# Altium PCB Arduino_3D_Extension..PcbDoc
Units mm, origin at the board's own origin, x right, y up, seen from the top; angles counter-clockwise.
Board outline 64.77 x 92.71 mm, 2 copper layers (Top Layer, Bottom Layer); 26 components, 38 nets, 84 pads, 2 vias.
Unrouted connection lines stored in the file: 1.
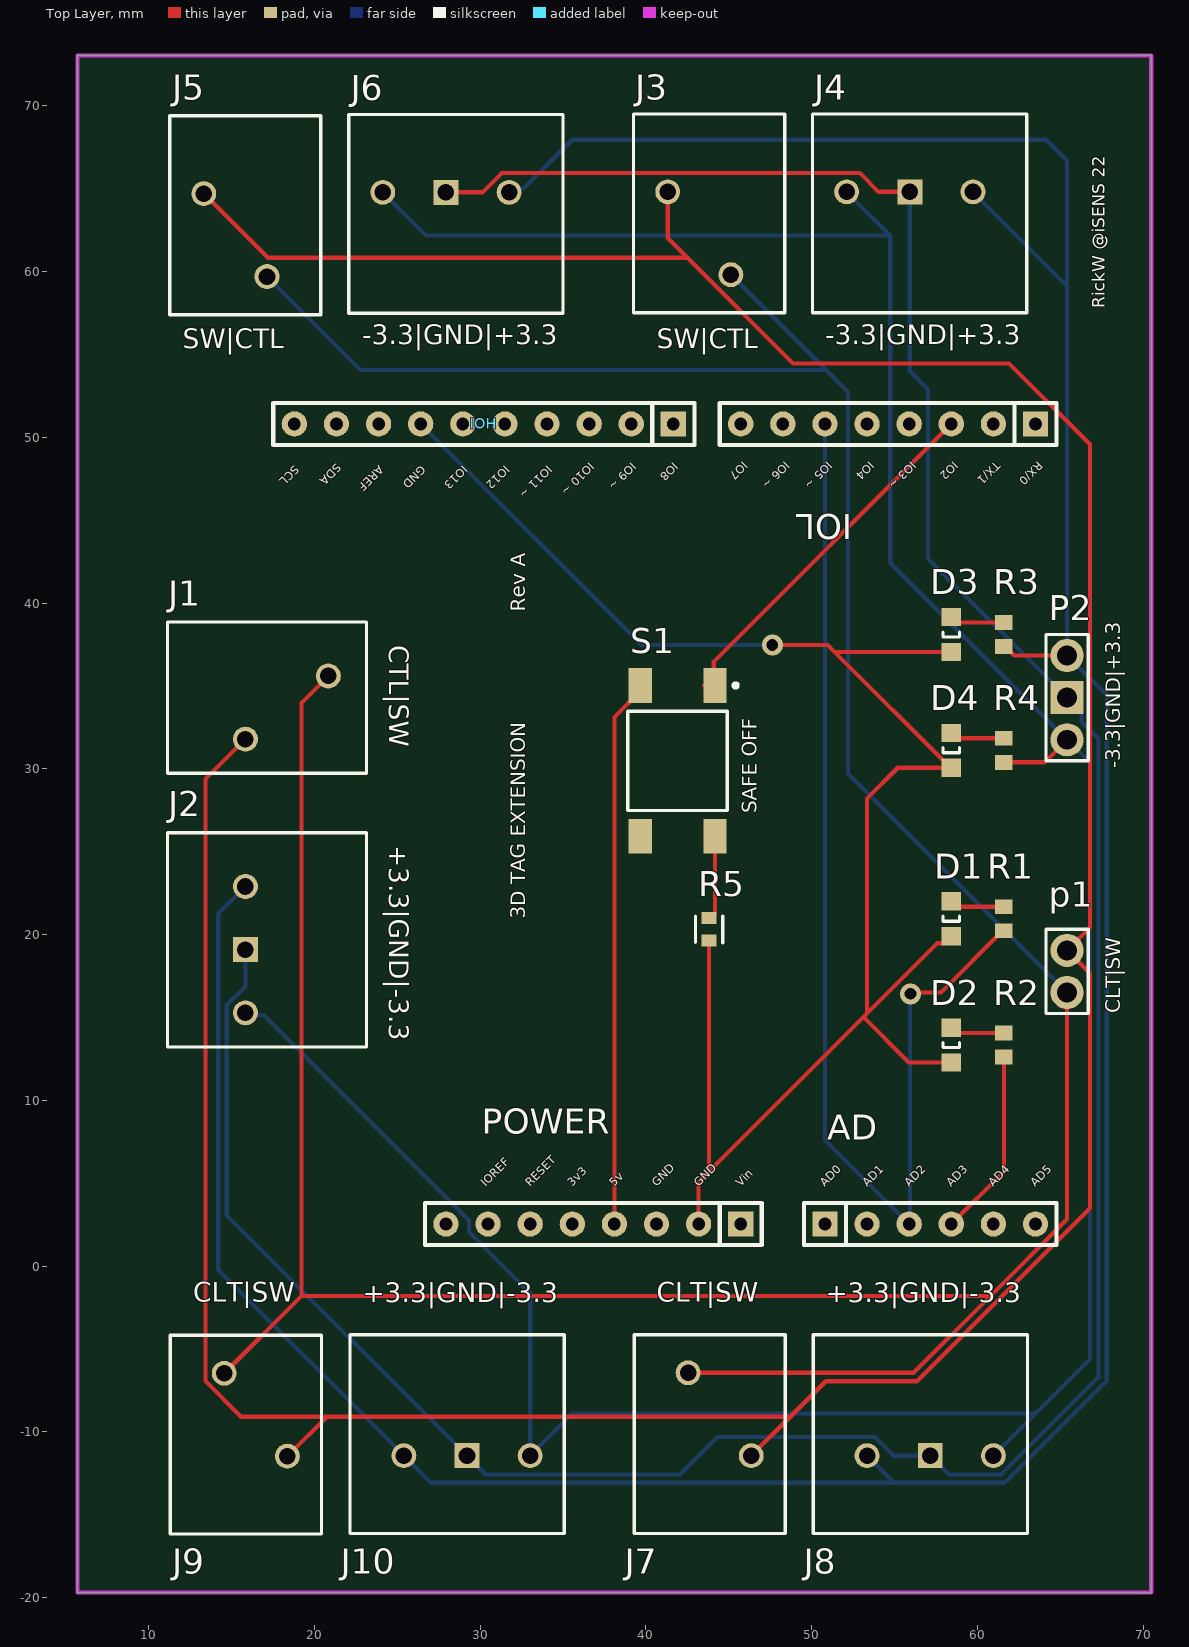
[diagram p0: Top Layer view]
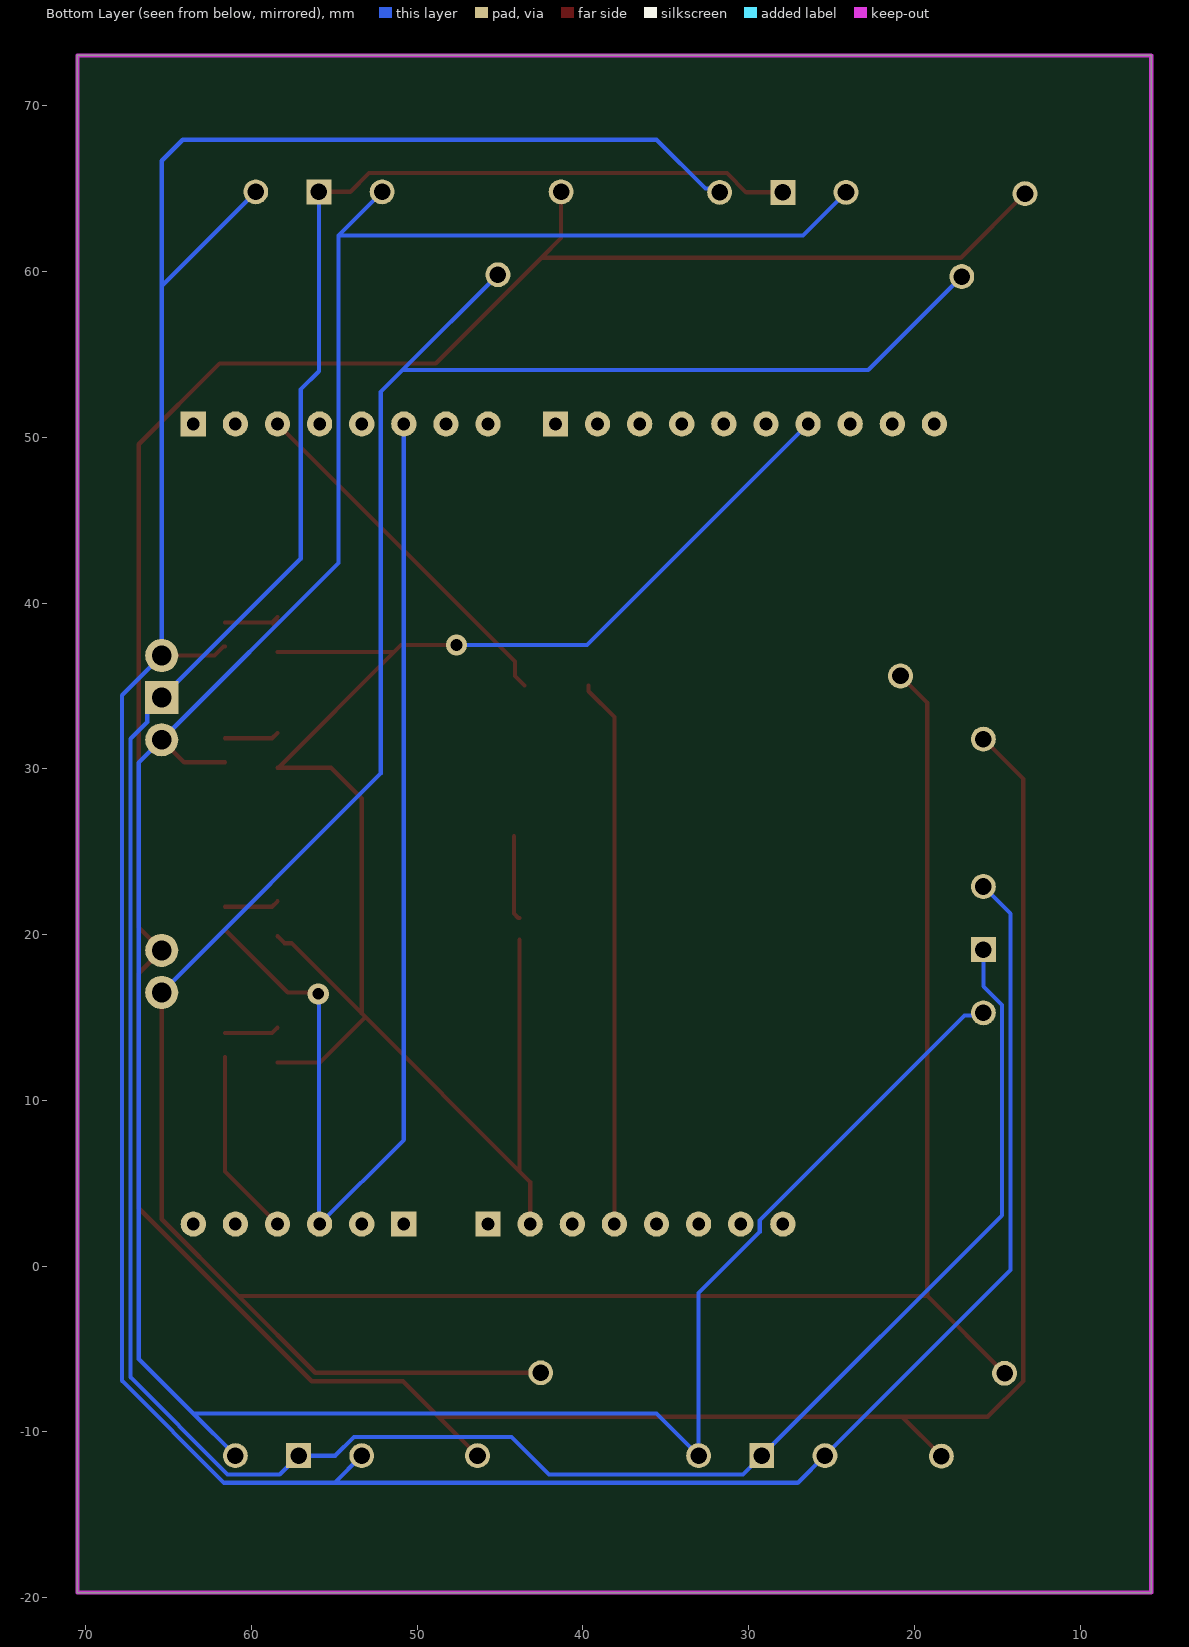
[diagram p1: Bottom Layer view, seen from below]
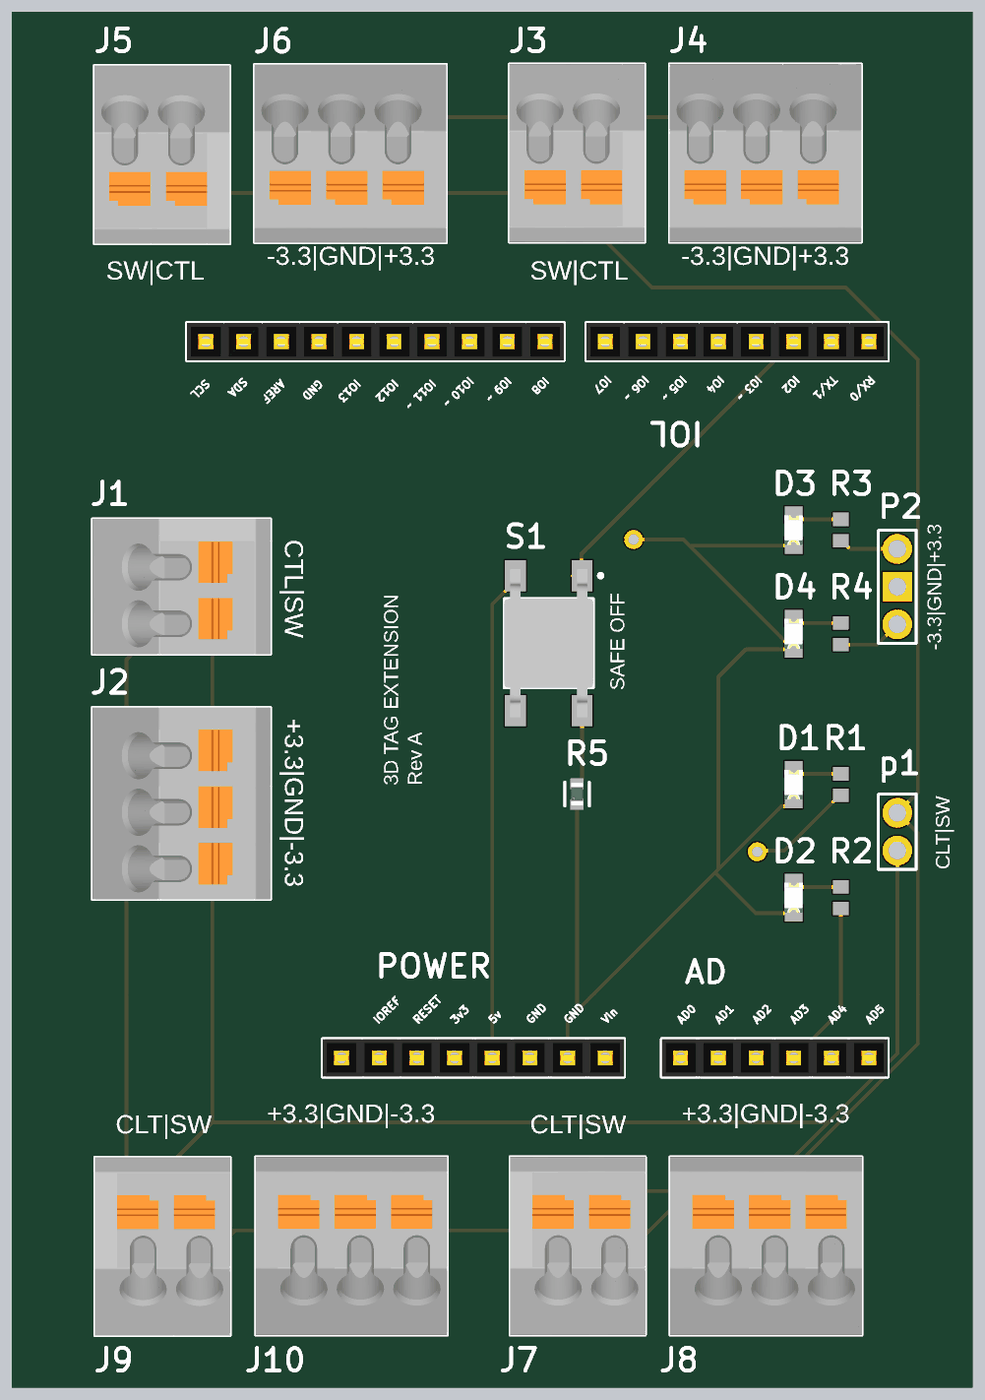
[diagram p2: 3D render of the assembled board from above, using the file's embedded part models]

## Layer stack, top to bottom
Top Solder: solder mask 0.0102, Solder Resist, Dk 3.5
Top Layer: signal copper 0.0356
Dielectric1: dielectric 0.32, FR-4, Dk 4.8
Bottom Layer: signal copper 0.0356
Bottom Solder: solder mask 0.0102, Solder Resist, Dk 3.5

## Board outline
5.715,-19.685 5.715,73.025 70.485,73.025 70.485,-19.685

## Design rules (kind name [scope] priority, off if disabled: settings)
Clearance [All] p1: gap=0.254 ignorepadtopadclearanceinfootprint=FALSE except(0: Arc-Hole Track-Hole SMDPad-Hole THPad-Hole Via-Hole Fill-Hole Poly-Hole Region-Hole Text-Hole)
PolygonConnect [All] p1: connectstyle=Relief reliefconductorwidth=0.254 reliefentries=4 polygonreliefangle="90 Angle" airgapwidth=0.254
RoutingVias [All] p1: holewidth=0.711 width=1.27 viastyle="Through Hole" minholewidth=0.711 minwidth=1.27 maxholewidth=0.711 maxwidth=1.27
SilkToSolderMaskClearance SilkscreenOverComponentPads [IsPad] p1: minsilkscreentomaskgap=0.254 clearancetoexposedcopper=TRUE
SolderMaskExpansion [All] p1: expansion=0.102 istentingtop=FALSE
Width [All] p1: maxlimit=0.254 minlimit=0.254 preferedwidth=0.254
29 further rules are at their usual default settings.

## Components (designator, comment, footprint, x,y, rotation, side; value= is the part's Value field where it differs from the comment)
AD "AD" "Header 6x1 8.5mm" 50.8,2.54 r0 top locked
D1 "Red" 0805_A 58.42,20.955 r90 top
D2 "Blue" 0805_A 58.42,13.335 r90 top
D3 "Yello" 0805_A 58.42,38.1 r90 top
D4 "Green" 0805_A 58.42,31.115 r90 top
IOH "IOH" "Header 10x1 8.5mm" 41.656,50.8 r180 top locked
IOL "IOL" "Header 8x1 8.5mm" 63.5,50.8 r180 top locked
J1 "691412320002" 691412320002 17.145,34.29 r270 top
J2 "691418320003" 691418320003 17.145,19.685 r270 top
J3 "691412320002" 691412320002 43.815,63.5 r180 top
J4 "691418320003" 691418320003 56.515,63.5 r180 top
J5 "691412320002" 691412320002 15.835,63.39 r180 top
J6 "691418320003" 691418320003 28.535,63.47 r180 top
J7 "691412320002" 691412320002 43.855,-10.13 r0 top
J8 "691418320003" 691418320003 56.555,-10.13 r0 top
J9 "691412320002" 691412320002 15.875,-10.16 r0 top
J10 "691418320003" 691418320003 28.615,-10.13 r0 top
p1 "CTL/SW" HDR1X2 65.405,16.51 r90 top (schematic designator P1)
P2 "Power" HDR1X3 65.405,31.75 r90 top
POWER "POWER_UNO" "Header 8x1 8.5mm" 45.72,2.54 r180 top locked
R1 "140" RESC1608X55X30ML15T15 61.595,20.955 r90 top
R2 "300" RESC1608X55X30ML15T15 61.595,13.335 r270 top
R3 "140" RESC1608X55X30ML15T15 61.595,38.1 r90 top
R4 "140" RESC1608X55X30ML15T15 61.595,31.115 r90 top
R5 "10K" FP-RNCP0603-MFG 43.815,20.32 r90 top
S1 "Safe Off" TECO-FSM4JSMA_V 41.91,30.48 r0 top

## Footprints (in the part's own frame and the unit in brackets; to place one, negate y for a bottom-side part, rotate by r counter-clockwise, add the part's x,y. Pads: shape width x height; smd on the part's side, far side on the other; paste and mask are expansions set on the pad)
0805_A [mm] "Chip LED, 2-Leads, Body 2.0x1.3mm, IPC Medium Density"
  rect 1.1x1.2 smd: 1(-1.05,0) 2(1.05,0)
  silkscreen extent -0.15,-0.5 0.15,0.5, body extent -1,-0.62 1,0.63, height 0.68
691412320002 [mm] "3.81mm 45¡ã Cable Entry Screwless, 2p"
  round 1.5 hole 1: 1(2.5,-1.3) 2(-1.31,3.7)
  silkscreen extent -4.56,-6 4.56,6, body extent -4.56,-6 4.56,6, height 13.28
691418320003 [mm] "Serie 4183-3.81mm 45¡ã Cable Entry Screwless, 3 pins"
  round 1.5 hole 1: 1(-3.215,-1.3) 3(4.405,-1.3)
  rect 1.5x1.5 hole 1: 2(0.595,-1.3)
  silkscreen extent -6.46,-6 6.47,6, body extent -6.47,-6 6.46,6, height 13.28
FP-RNCP0603-MFG [mm]
  rect 0.725x0.9 smd paste+0 mask+0: 1(-0.687,0) 2(0.687,0)
  silkscreen extent -0.81,-0.83 0.8,0.82, body extent -1.15,-0.55 1.15,0.55, height 0.25
HDR1X2 [mm] "Connector; Header; 2 Position"
  round 2 hole 1.2: 1(0,0) 2(2.54,0)
  silkscreen extent -1.27,-1.27 3.81,1.27
HDR1X3 [mm] "Connector; Header; 3 Position"
  round 2 hole 1.2: 1(0,0) 3(5.08,0)
  rect 2x2 hole 1.2: 2(2.54,0)
  silkscreen extent -1.27,-1.27 6.35,1.27
"Header 6x1 8.5mm" [mil] "Stackable 6 pin header"
  rect 60x60 hole 30: 1(0,0)
  round 60 hole 30: 2(100,0) 3(200,0) 4(300,0) 5(400,0) 6(500,0)
  silkscreen extent -50,-50 550,50, body extent -50,-50 550,50, height 335
"Header 8x1 8.5mm" [mil] "Stackable 8 pin header"
  rect 60x60 hole 30: 1(0,0)
  round 60 hole 30: 2(100,0) 3(200,0) 4(300,0) 5(400,0) 6(500,0) 7(600,0) 8(700,0)
  silkscreen extent -50,-50 750,50, body extent -50,-50 750,50, height 335
"Header 10x1 8.5mm" [mil] "Stackable 10 pin header"
  rect 60x60 hole 30: 1(0,0)
  round 60 hole 30: 2(100,0) 3(200,0) 4(300,0) 5(400,0) 6(500,0) 7(600,0) 8(700,0) 9(800,0) 10(900,0)
  silkscreen extent -50,-50 950,50, body extent -50,-50 950,50, height 335
RESC1608X55X30ML15T15 [mm] "Chip Resistor, 2-Leads, Body 1.60x0.80mm, IPC Low Density"
  rect 0.9x1.05 smd: 1(-0.725,0) 2(0.725,0)
  body extent -0.87,-0.48 0.87,0.48, height 0.55
TECO-FSM4JSMA_V [mm] "SMD, 4-Leads, Body 6x6mm, Pitch 4.5mm"
  rect 1.4x2.1 smd: 1(2.25,4.55) 2(2.25,-4.55) 3(-2.25,4.55) 4(-2.25,-4.55)
  silkscreen extent -3,-3 3.63,4.67, body extent -3,-5 3,5, height 5.08

## Part data
AD: Supplier Part Number 1=2699089, Supplier 1=Arrow, Supplier 2=Digi-Key, Supplier 3=Arrow, Supplier 4=Arrow, Supplier Part Number 2=SAM1198-06-ND, Supplier Part Number 3=2699088, Supplier Part Number 4=2699075
D1: library part CMP-1426-00011-1, "SMD mono-color Chip LED, WL-SMCW, Red", Manufacturer="Wuerth Elektronik", PartNumber=150080RS75000, Color=Red, ComponentLink1Description="Manufacturer URL", ComponentLink1URL=http://www.we-online.com, ComponentLink2Description=Datasheet, ComponentLink2URL=http://katalog.we-online.com/led/datasheet/150080RS75000.pdf, PackageReference=0805_A
D2: library part CMP-1426-00008-1, "SMD mono-color Chip LED, WL-SMCW, Blue", Manufacturer="Wuerth Elektronik", PartNumber=150080BS75000, Color=Blue, ComponentLink1Description="Manufacturer URL", ComponentLink1URL=http://www.we-online.com, ComponentLink2Description=Datasheet, ComponentLink2URL=http://katalog.we-online.com/led/datasheet/150080BS75000.pdf, PackageReference=0805_A
D3 D4: library part CMP-1426-00011-1, "SMD mono-color Chip LED, WL-SMCW, Red", Color=Red, Manufacturer="Wuerth Elektronik", PartNumber=150080RS75000, ComponentLink1Description="Manufacturer URL", ComponentLink1URL=http://www.we-online.com, ComponentLink2Description=Datasheet, ComponentLink2URL=http://katalog.we-online.com/led/datasheet/150080RS75000.pdf, PackageReference=0805_A
IOH: Supplier Part Number 1=2698803S4475693N1004, Supplier 1=Arrow, Supplier 2=Digi-Key, Supplier 3=Arrow, Supplier Part Number 2=SAM1198-10-ND, Supplier Part Number 3=2698789
IOL POWER: Supplier Part Number 1=SAM1198-08-ND, Supplier 1=Digi-Key, Supplier 2=Arrow, Supplier 3=Arrow, Supplier 4=Arrow, Supplier Part Number 2=2698939, Supplier Part Number 3=2698940, Supplier Part Number 4=2698925
J1 J3 J5 J7 J9: library part CMP-1502-02948-1, "Serie 4123 - 3.81mm Screwless 45deg Entry WR-TBL, 2 pin", Manufacturer="Wurth Elektronik", Operating Temperature=-30to120degC, Datasheet URL=http://katalog.we-online.de/em/datasheet/691412320002.pdf, Manufacturer URL=http://www.we-online.de, Mounting Technology=THT, Package Reference=691412320002, Packaging=Box, Part Number=691412320002, Pin Number=2, Pitch=3.81mm, Publisher=WurthElektronik
J2 J4 J6 J8 J10: library part CMP-1502-02976-1, "Serie 4183 - 3.81mm 45deg Entry Screwless WR-TBL, 3 pin", Manufacturer="Wurth Elektronik", Operating Temperature=-30to120degC, Datasheet URL=http://katalog.we-online.de/em/datasheet/6914183200xx.pdf, Manufacturer URL=http://www.we-online.de, Mounting Technology=THT, Package Reference=691418320003, Packaging=Box, Part Number=691418320003, Pin Number=3, Pitch=3.81mm, Publisher=WurthElektronik
p1: library part "Header 2", "Header, 2-Pin", LatestRevisionDate=17-Jul-2002, LatestRevisionNote="Re-released for DXP Platform.", Publisher="Altium Limited"
P2: library part "Header 3", "Header, 3-Pin", LatestRevisionDate=17-Jul-2002, LatestRevisionNote="Re-released for DXP Platform.", Publisher="Altium Limited"
R1 R3 R4: library part CMP-2000-00245-1, Manufacturer=Panasonic, Part Number=ERJ-3EKF1400V
R2: library part CMP-2000-00766-1, Manufacturer=Panasonic, Part Number=ERJ-3GEYJ301V
R5: library part CMP-26527-000099-1, "10kΩ ±1% 0.125W 0603 High Power Anti-Sulfur Thin Film Chip Resistor", Case Code (Imperial)=0603, Case Code (Metric)=1608, Max Operating Temperature=155°C, Max Power Dissipation=125mW, Min Operating Temperature=-55°C, Resistance=10kR, Resistor Type="Thin Film", Temperature Coefficient=100ppm/°C, Tolerance=1%, Case/Package=0603, Contact Plating=Tin, Features="Moisture Resistant", Height=0.02inch, Lead Free="Lead Free", Length=0.059inch, Mount="Surface Mount", Number of Terminations=2, Packaging="Tape and Reel", Radiation Hardening=No, RoHS Compliant=Yes, Series=RNCP, Width=0.031inch
S1: library part CMP-2000-05602-2, "Swicth, SPST, 24 V, -35 to 85 degC, 4-Pin SMD, RoHS, Tape and Reel", Case\/Package=SMD/SMT, Contact Current Rating=50mA, Contact Resistance=100mOhm, Manufacturer="TE Connectivity", Max Operating Temperature=85degC, Max Voltage Rating (DC)=12V, Min Operating Temperature=-35degC, Operating Force=1.57N, Package Description="4-Pin Surface Mount Device, Body 6 x 6 mm, Pitch 4.5 mm", Package Quantity=750, Package Reference=FSM4JSMA, Voltage Rating=24V, Actuator Length=0.055inch, Actuator Material=Polyamide, Contact Material=CopperAlloy, Contact Plating=Silver, Current Rating=50mA, Datasheet URL=http://www.te.com/commerce/DocumentDelivery/DDEController?Action=showdoc&DocId=Customer+Drawing%7F2-1437565-7%7FV%7Fpdf%7FEnglish%7FENG_CD_2-1437565-7_V.pdf%7F4-1437565-2, Datasheet Version="Rev. V, 02/2015", Electrical Life=100000Cycles, Illumination Type=Illuminated, Length=6mm, Manufacturer URL=http://www.te.com/, Mechanical Life=100000Cycles, Mount=SurfaceMount, Mounting Technology=SurfaceMount, Orientation=Straight, Packaging=LoosePiece, REACH SVHC=Unknown, RoHSCompliant=true, Switch Travel=0.25mm, Termination=GullWing, Throw Configuration=SPST, Voltage Rating (DC)=24V, Width=6mm

## Via types
v1: diameter 1.27, hole 0.711, Top Layer to Bottom Layer, 2 vias

## Nets (pads, with @x,y where several pads share a name; then routed paths per layer and width w, separated by ;. In a path a pad name is that pad's centre, name@x,y a point inside that pad or via, vN(x,y) a via of type N, cw(c..) or ccw(c..) an arc to the next point about the centre after c; other vN are vias at no path point)
3V3: POWER.5
5V: POWER.4 S1.3 | length 33.1
  Top Layer w0.254: POWER.4 38.1,33.12 39.66,34.68 S1.3
AD0: AD.1
AD1: AD.2
AD2: AD.3 IOL.6 R1.1 | length 71.5
  Top Layer w0.254: v1(55.963,16.427) 56.047,16.51 57.8,16.51 61.52,20.23 R1.1
  Bottom Layer w0.254: IOL.6 50.8,7.62 AD.3 55.922,2.582 55.922,16.385 v1(55.963,16.427)
AD3: AD.4 R2.2 | length 11.4
  Top Layer w0.254: AD.4 61.595,5.715 R2.2
AD4: AD.5
AD5: AD.6
AREF: IOH.8
GND: D1.1 D2.1 D3.1 D4.1 IOH.7 POWER.2 POWER.3 R5.1 | length 110.7
  Top Layer w0.254: POWER.2 43.18,5.08 43.815,5.715 ; R5.1@43.815,19.685 43.815,5.715 ; v1(47.625,37.465) 50.97,37.465 51.385,37.05 ; 53.34,15.24 53.34,28.21 55.195,30.065 D4.1@58.37,30.065 ; D2.1 55.855,12.285 53.12,15.02 ; D1.1 57.997,19.482 57.582,19.482 53.12,15.02 ; D4.1 D4.1@58.37,30.065 ; D3.1 51.385,37.05 ; 43.815,5.715 53.12,15.02 ; 51.385,37.05 D4.1@58.37,30.065
  Bottom Layer w0.254: IOH.7 39.751,37.465 v1(47.625,37.465)
IO0: IOL.1
IO1: IOL.2
IO2: IOL.3 S1.1 | length 21.9
  Top Layer w0.254: S1.1@43.525,35.03 44.098,35.603 44.098,36.478 IOL.3
IO3: IOL.4
IO4: IOL.5
IO6: IOL.7
IO7: IOL.8
IO8: IOH.1
IO9: IOH.2
IO10: IOH.3
IO11: IOH.4
IO12: IOH.5
IO13: IOH.6
IOREF: POWER.7
NetD1_2: D1.2 R1.2 | length 3.3
  Top Layer w0.254: D1.2 58.745,21.68 R1.2
NetD2_2: D2.2 R2.1 | length 3.3
  Top Layer w0.254: D2.2 58.745,14.06 R2.1
NetD3_2: D3.2 R3.2 | length 3.6
  Top Layer w0.254: D3.2@58.42,38.93 D3.2@58.655,38.695 ; D3.2 58.745,38.825 R3.2
NetD4_2: D4.2 R4.2 | length 3.3
  Top Layer w0.254: D4.2 58.745,31.84 R4.2
NetJ1_1: J1.1 J3.1 J5.1 J7.1 J9.1 p1.2 | length 217.3
  Top Layer w0.254: J5.1 17.204,60.821 42.505,60.821 ; J1.1 13.434,29.379 13.434,-6.928 15.585,-9.08 20.755,-9.08 ; J9.1 20.755,-9.08 ; J3.1 41.315,62.011 42.505,60.821 ; J7.1 48.705,-9.08 ; 20.755,-9.08 48.705,-9.08 ; 42.505,60.821 48.871,54.454 61.909,54.454 66.786,49.577 66.786,20.431 p1.2 66.786,17.669 66.786,3.491 56.357,-6.938 50.847,-6.938 48.705,-9.08
NetJ1_2: J1.2 J3.2 J5.2 J7.2 J9.2 p1.1 | length 214.3
  Top Layer w0.254: J9.2 19.224,-1.801 ; J1.2 19.224,33.979 19.224,-1.801 ; J7.2 56.146,-6.43 60.776,-1.801 ; p1.1 65.405,2.829 60.776,-1.801 ; 19.224,-1.801 60.776,-1.801
  Bottom Layer w0.254: J5.2 22.785,54.05 50.875,54.05 ; J3.2 50.875,54.05 ; p1.1 52.197,29.718 52.197,52.728 50.875,54.05
NetJ2_1: J2.1 J4.1 J6.1 J8.1 J10.1 P2.3 R3.1 | length 209.7
  Top Layer w0.254: R3.1 61.67,37.375 62.215,36.83 P2.3
  Bottom Layer w0.254: J2.1 14.206,21.261 14.206,-0.236 J10.1 27.039,-13.069 54.979,-13.069 ; J6.1 31.978,64.998 32.613,64.998 35.56,67.945 64.135,67.945 65.405,66.675 65.405,59.125 ; J8.1 54.979,-13.069 ; J4.1 65.405,59.125 ; 54.979,-13.069 61.639,-13.069 67.802,-6.906 67.802,34.433 P2.3 65.405,59.125
NetJ2_2: J2.2 J4.2 J6.2 J8.2 J10.2 P2.2 | length 185
  Top Layer w0.254: J6.2 30.151,64.77 31.312,65.931 52.904,65.931 54.035,64.8 J4.2
  Bottom Layer w0.254: J2.2 15.845,16.879 14.714,15.748 14.714,3.066 J10.2 30.341,-12.561 42.049,-12.561 44.311,-10.299 53.808,-10.299 54.939,-11.43 J8.2 58.281,-12.561 61.428,-12.561 67.294,-6.695 67.294,31.814 66.278,32.83 66.278,33.417 P2.2 57.023,42.672 57.023,52.873 55.92,53.976 J4.2
NetJ2_3: J2.3 J4.3 J6.3 J8.3 J10.3 P2.1 R4.1 | length 186.7
  Top Layer w0.254: R4.1 64.045,30.39 P2.1
  Bottom Layer w0.254: J2.3 16.005,15.12 16.976,15.12 29.337,2.759 29.337,2.067 33.02,-1.616 J10.3 35.56,-8.89 63.5,-8.89 ; J6.3 26.727,62.173 54.737,62.173 ; J4.3 54.737,62.173 ; J8.3 63.5,-8.89 ; 54.737,62.173 54.737,42.418 P2.1 66.786,30.369 66.786,-5.604 63.5,-8.89
NetR5_2: R5.2 S1.2 | length 5.1
  Top Layer w0.254: R5.2 43.903,21.007 44.16,21.265 S1.2
RESET: POWER.6
SCL: IOH.10
SDA: IOH.9
VIN: POWER.1
pads on no net: POWER.8 S1.4

## Keep-outs
Keep-Out Layer:
  the board outline again, w0.254

## Other copper
Top Layer:

## Silkscreen, mask and mechanical layers (free items; w line width, h text height)
Top Overlay:
  text "RickW @iSENS 22" at 67.945,57.785 h1.3 r90
  text "-3.3|GND|+3.3" at 22.888,55.213 h2
  text "-3.3|GND|+3.3" at 50.828,55.213 h2
  text "SW|CTL" at 12.065,54.987 h2
  text "SW|CTL" at 40.64,54.987 h2
  text "IO7" at 45.847,48.588 h0.51 r225
  text "IO6 ~" at 48.387,48.588 h0.51 r225
  text "IO5 ~" at 50.927,48.588 h0.51 r225
  text "IO4" at 53.467,48.588 h0.51 r225
  text "IO3 ~" at 56.007,48.588 h0.51 r225
  text "IO2" at 58.547,48.588 h0.51 r225
  text "TX/1" at 61.087,48.588 h0.51 r225
  text "RX/0" at 63.627,48.588 h0.51 r225
  text "IO10 ~" at 36.576,48.514 h0.51 r225
  text "IO9 ~" at 39.116,48.514 h0.51 r225
  text "IO8" at 41.656,48.514 h0.51 r225
  text "SDA" at 21.336,48.461 h0.51 r225
  text "SCL" at 18.796,48.334 h0.51 r225
  text "AREF" at 23.876,48.334 h0.51 r225
  text "GND" at 26.416,48.334 h0.51 r225
  text "IO13" at 28.956,48.334 h0.51 r225
  text "IO12" at 31.496,48.334 h0.51 r225
  text "IO11 ~" at 34.036,48.334 h0.51 r225
  text "CTL|SW" at 24.13,37.465 h2 r270
  text "-3.3|GND|+3.3" at 68.923,30.019 h1.5 r90
  text "SAFE OFF" at 46.99,27.305 h1.52 r90
  text "+3.3|GND|-3.3" at 24.13,25.4 h2 r270
  text "3D TAG EXTENSION                 Rev A" at 33.02,20.955 h1.52 r90
  text "CLT|SW" at 68.928,15.24 h1.52 r90
  text "IOREF" at 30.353,4.752 h0.51 r45
  text "RESET" at 33.02,4.752 h0.51 r45
  text "3v3" at 35.56,4.752 h0.51 r45
  text "5v" at 38.1,4.752 h0.51 r45
  text "GND" at 40.64,4.752 h0.51 r45
  text "GND" at 43.18,4.752 h0.51 r45
  text "Vin" at 45.72,4.752 h0.51 r45
  text "AD0" at 50.8,4.752 h0.51 r45
  text "AD1" at 53.34,4.752 h0.51 r45
  text "AD2" at 55.88,4.752 h0.51 r45
  text "AD3" at 58.42,4.752 h0.51 r45
  text "AD4" at 60.96,4.752 h0.51 r45
  text "AD5" at 63.5,4.752 h0.51 r45
  text "CLT|SW" at 12.7,-2.54 h2
  text "CLT|SW" at 40.64,-2.54 h2
  text "+3.3|GND|-3.3" at 22.91,-2.572 h2
  text "+3.3|GND|-3.3" at 50.85,-2.572 h2
Mechanical 1:
  lines w0.254: 5.715,-19.685 5.715,73.025 70.485,73.025 70.485,61.595 70.485,-19.685 5.715,-19.685